# Altium PCB Elevate_sch.PcbDoc (part 1 of 2)
Units mm, origin at the board's own origin, x right, y up, seen from the top; angles counter-clockwise.
Board outline 81.14 x 61.52 mm, 2 copper layers (Top Layer, Bottom Layer), stack 1.554 mm thick; 108 components, 119 nets, 558 pads, 275 vias.
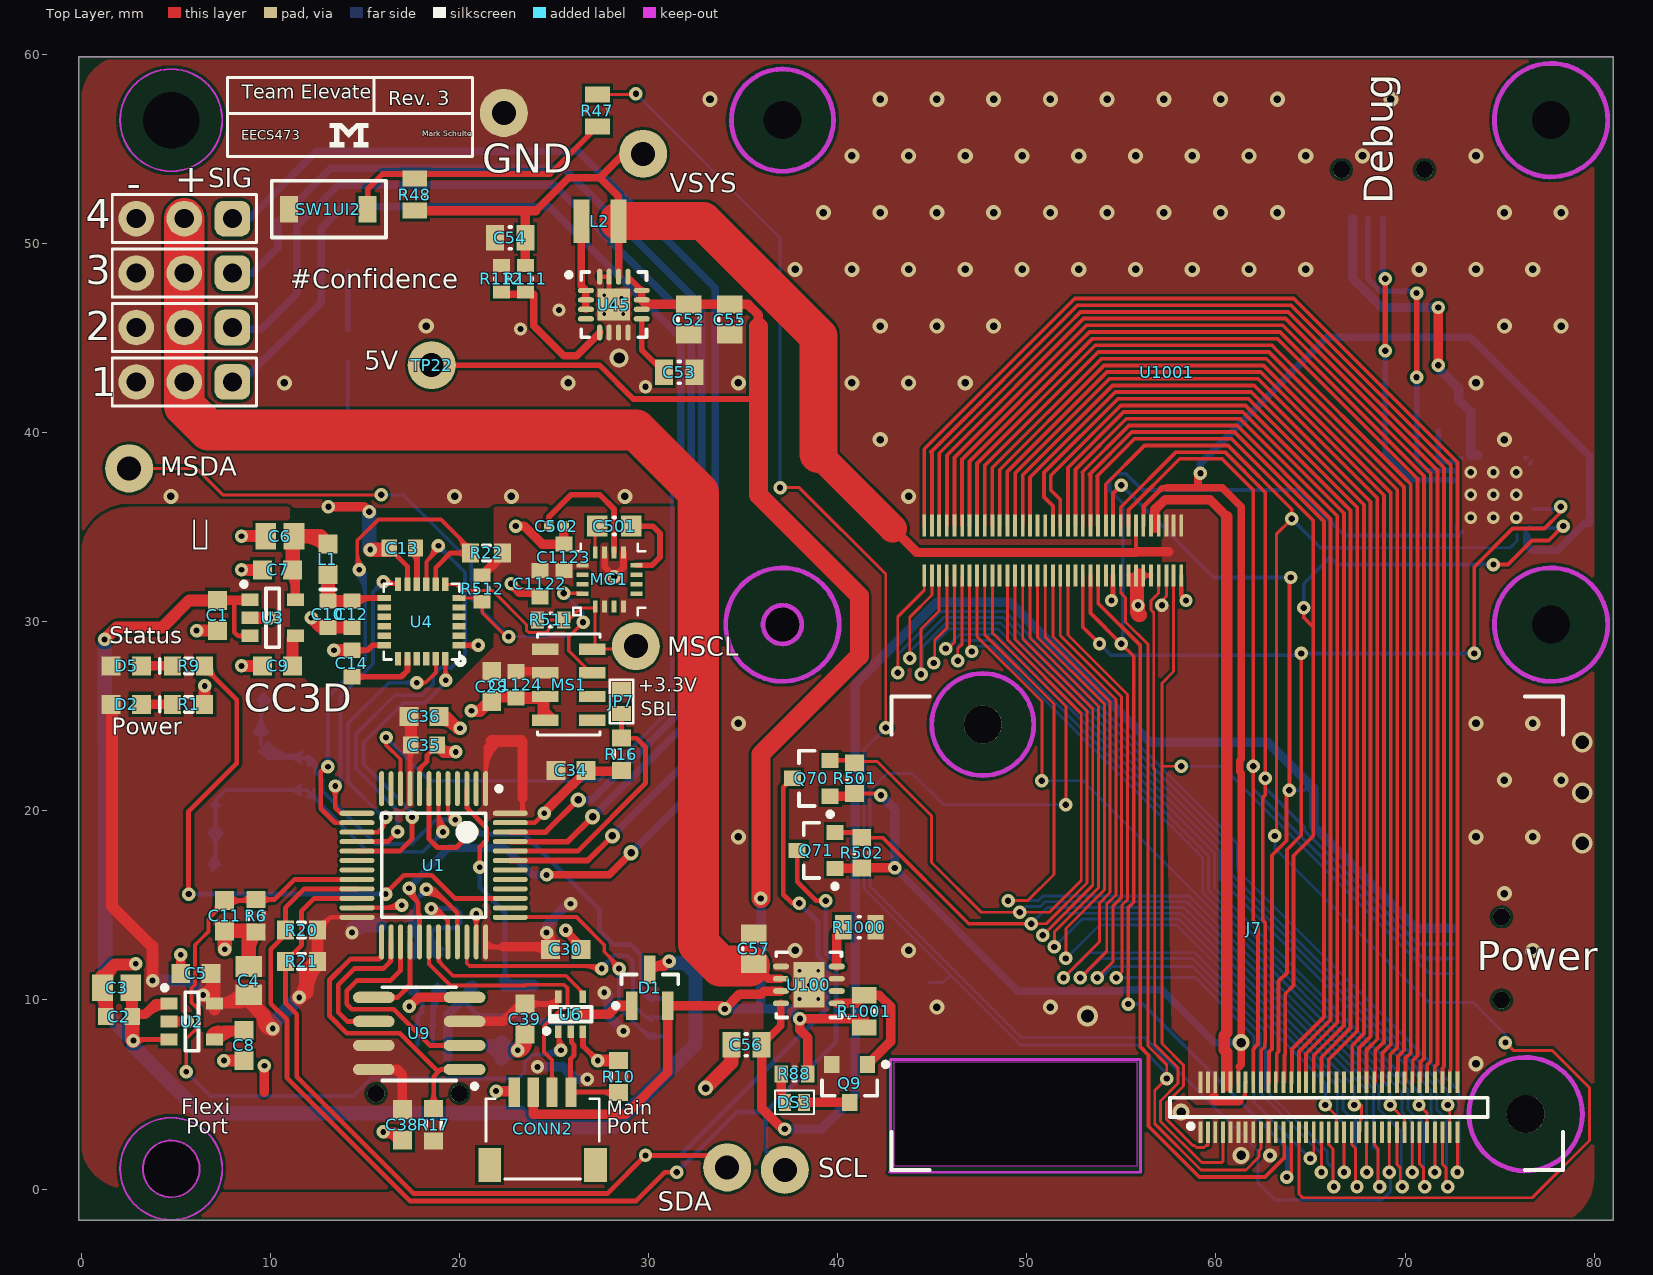
[diagram p0: Top Layer view]
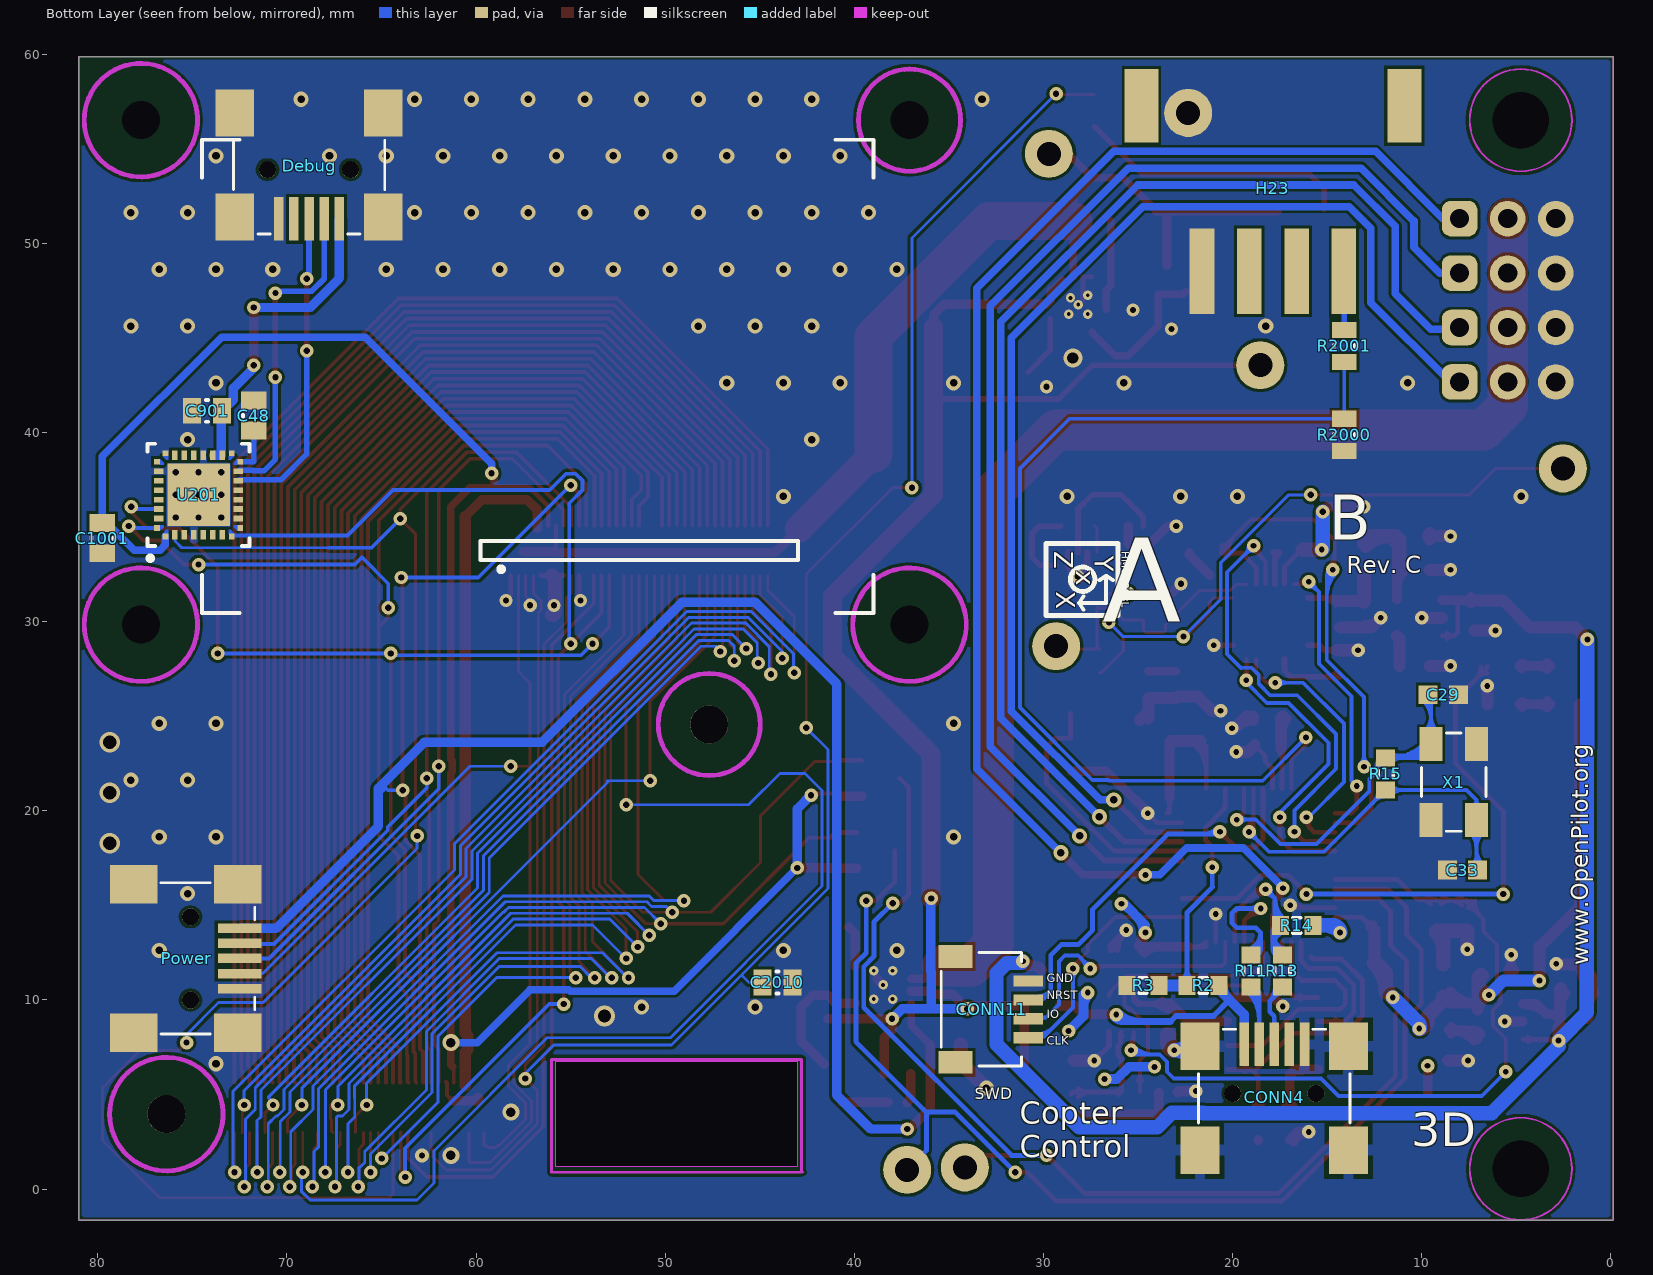
[diagram p1: Bottom Layer view, seen from below]
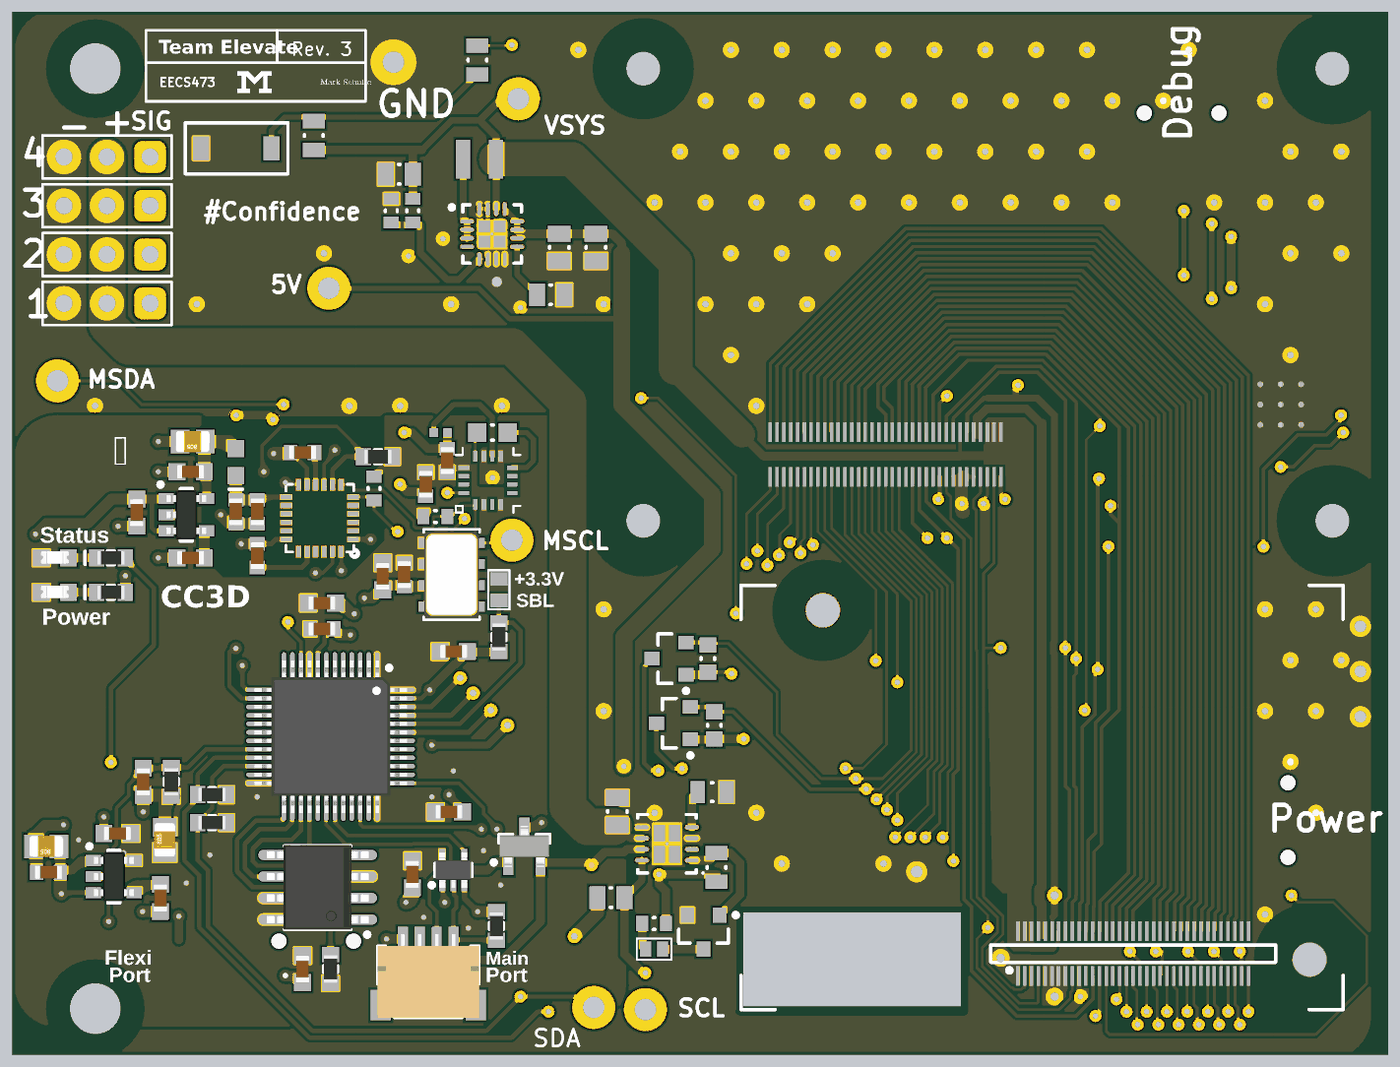
[diagram p3: 3D render of the assembled board from above, using the file's embedded part models]
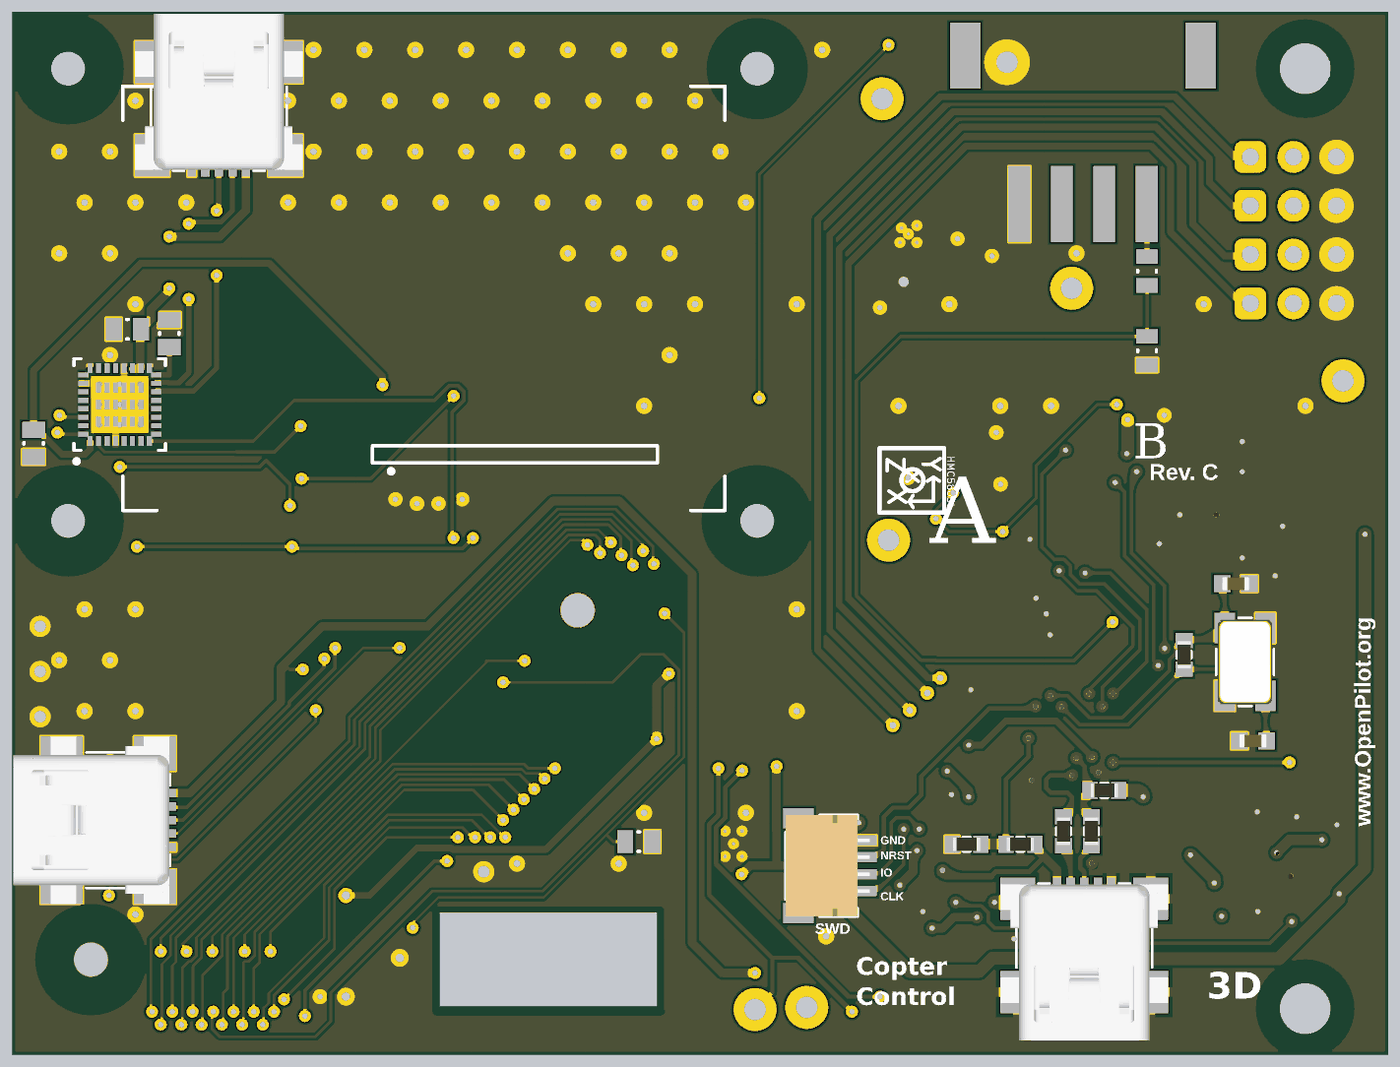
[diagram p4: 3D render of the assembled board from below, using the file's embedded part models]

## Layer stack, top to bottom
Top Solder: solder mask 0.0102, Solder Resist, Dk 3.5
Top Layer: signal copper 0.0356
Dielectric1: core 1.4834, FR-4, Dk 4.8
Bottom Layer: signal copper 0.0356
Bottom Solder: solder mask 0.0102, Solder Resist, Dk 3.5

## Board outline
-0.127,-1.651 81.016,-1.651 81.016,59.873 -0.127,59.873
cut-out: 42.989,1.206 42.989,6.731 55.816,6.731 55.816,1.206

## Design rules (kind name [scope] priority, off if disabled: settings)
AcuteAngle [All] p1: minimum=6.00000000000000E+0001 checktracksonly=FALSE
Clearance [All] p1: gap=0.153
Clearance Clearance_osc [InNet('GND') vs InNet('OSC_IN') or InNet('OSC_OUT')] p2: gap=0.381
Clearance Clearance_outline [All vs OnLayer('Keep-Out Layer')] p3: gap=0.381
Clearance "VCC_UNREG Pour Clearance" [(InNamedPolygon('Top-VCC') OR InNamedPolygon('Bottom Layer-GND')) vs (InNet('VCC_UNREG'))] p4: gap=0.305
Clearance "Small Part Clearance" [(HasFootprint('IMU-3000'))] p5: gap=0.152
ComponentClearance ComponentClearance_servo_headers [InComponent('JP1') or InComponent('JP2') or InComponent('JP3') or InComponent('JP4') or InComponent('JP5') or InComponent('JP6')] p1: gap=0.127 collisioncheckmode=3 verticalgap=0.254 showdistances=FALSE
ComponentClearance [All] p2: gap=0.254 collisioncheckmode=3 verticalgap=0.254 showdistances=FALSE
DiffPairsRouting [All] p1: maxlimit=0.508 minlimit=0.152 mostfreqgap=0.254 toplayer_minwidth=0.381 toplayer_maxwidth=0.381 toplayer_prefwidth=0.381 bottomlayer_minwidth=0.381 bottomlayer_maxwidth=0.381 bottomlayer_prefwidth=0.381 maxuncoupledlength=12.7
HoleSize [All] p1: absolutevalues=TRUE maxlimit=25.4 minlimit=0.305 maxpercent=80.000 minpercent=20.000
MinimumAnnularRing [All] p1: minimumring=0.178
MinimumSolderMaskSliver MinimumSolderMaskSliver_FIL1-3 [InComponent('FIL1') or InComponent('FIL2') or InComponent('FIL3')] p1: minsoldermaskwidth=0.025
MinimumSolderMaskSliver [All] p2: minsoldermaskwidth=0.076
PlaneClearance [All] p1: clearance=0.381
PlaneConnect [All] p1: planeconnectstyle=Direct reliefexpansion=0.508 reliefentries=4 reliefconductorwidth=0.254 reliefairgap=0.254
PolygonConnect PolygonConnect_usb [InComponent('CONN4')] p1: connectstyle=Relief reliefconductorwidth=0.559 reliefentries=4 polygonreliefangle="90 Angle" airgapwidth=0.254
PolygonConnect [All] p2: connectstyle=Direct reliefconductorwidth=0.305 reliefentries=4 polygonreliefangle="90 Angle" airgapwidth=0.254
RoutingVias [All] p1: holewidth=0.381 width=0.787 viastyle="Through Hole" minholewidth=0.332 minwidth=0.686 maxholewidth=0.711 maxwidth=1.27
SilkToSilkClearance SilkToSilkClearance_text [IsText] p1: silktosilkclearance=0
SilkToSilkClearance [All] p2: silktosilkclearance=0.102
SilkToSolderMaskClearance SilkscreenOverComponentPads [IsPad] p1: minsilkscreentomaskgap=0.051 clearancetoexposedcopper=TRUE
SolderMaskExpansion [All] p1: expansion=0.076
UnpouredPolygon [All] p1: allowunpoured=FALSE
Width [All] p1: maxlimit=10.16 minlimit=0.152 preferedwidth=0.254
21 further rules are at their usual default settings.

## Classes and differential pairs
component class U_battery_monitor: H23 R2000 R2001
differential pair USB_D: +USB_D_P -USB_D_N
differential pair USB_R: +USB_R_P -USB_R_N

## Components (designator, comment, footprint, x,y, rotation, side; value= is the part's Value field where it differs from the comment)
1 "Servo out 6" "SIP3 - 0.1" 8.001,42.672 r180 top (schematic designator JP1)
2 "Servo out 6" "SIP3 - 0.1" 8.001,45.551 r180 top (schematic designator JP2)
3 "Servo out 6" "SIP3 - 0.1" 8.001,48.429 r180 top (schematic designator JP3)
4 "Servo out 6" "SIP3 - 0.1" 8.001,51.308 r180 top (schematic designator JP4)
C1 "Cap603" CAP603N 7.214,30.328 r270 top locked
C2 "Cap603" CAP603L 2.007,9.119 r180 top locked
C3 "Cap805" CAP805L 1.88,10.643 r180 top locked
C4 "Cap805" CAP805L 8.865,11.024 r90 top locked
C5 "Cap603" CAP603N 6.071,11.405 r180 top locked
C6 "Cap805" CAP805L 10.516,34.519 r180 top locked
C7 "Cap603" CAP603N 10.389,32.741 r180 top locked
C8 "Cap603" CAP603N 8.611,7.595 r270 top locked
C9 "Cap603" CAP603N 10.389,27.661 r180 top locked
C10 "Cap603" CAP603L 13.056,30.383 r270 top locked
C11 "Cap603" CAP603N 7.595,14.453 r270 top locked
C12 "Cap603" CAP603L 14.326,30.383 r270 top locked
C13 "Cap603" CAP603L 16.993,33.884 r180 top locked
C14 "Cap603" CAP603L 14.326,27.788 r270 top locked
C28 "Cap603" CAP603N 21.717,26.57 r90 top
C29 "Cap603" CAP603N 8.865,26.137 r0 bottom locked
C30 "Cap603" CAP603N 25.629,12.675 r180 top locked
C33 "Cap603" CAP603N 7.849,16.866 r180 bottom locked
C34 "Cap603" CAP603N 25.908,22.137 r180 top
C35 "Cap603" CAP603L 18.136,23.47 r0 top locked
C36 "Cap603" CAP603N 18.136,24.994 r180 top locked
C38 "Cap603" CAP603N 16.993,3.404 r270 top locked
C39 "Cap603" CAP603N 23.47,8.992 r270 top locked
C48 "CAP 100nF 16V 0805(2012)" CAPC0805(2012)145_L 71.755,40.894 r270 bottom
C52 "CAP 100nF 16V 0805(2012)" CAPC0805(2012)145_L 32.131,45.974 r270 top
C53 "CAP 33nF 50V 0805(2012)" CAPC0805(2012)145_L 31.623,43.18 r180 top
C54 "CAP 22uF 6.3V 0805(2012)" CAPC0805(2012)145_L 22.695,50.292 r0 top
C55 "CAP 820pF 25V 0805(2012)" CAPC0805(2012)145_L 34.29,45.974 r90 top
C56 "CAP 100nF 16V 0805(2012)" CAPC0805(2012)145_L 35.179,7.62 r180 top
C57 "CAP 100nF 16V 0805(2012)" CAPC0805(2012)145_L 35.56,12.7 r90 top
C501 "CAP 220nF 6.3V 0603(1608)" CAPC0603(1608)100_M 28.194,35.052 r0 top
C502 "CAP 4.7uF 6.3V 0402(1005)" CAPC0402(1005)60_L 25.127,35.052 r180 top
C901 "CAP 100nF 16V 0805(2012)" CAPC0805(2012)145_L 74.226,41.148 r0 bottom
C1001 "CAP 100nF 16V 0805(2012)" CAPC0805(2012)145_L 79.756,34.417 r270 bottom
C1122 "Cap603" CAP603L 24.257,32.001 r90 top
C1123 "Cap603" CAP603L 25.527,33.401 r270 top
C1124 "Cap603" CAP603L 22.987,26.67 r90 top
C2010 "CAP 220nF 16V 0805(2012)" CAPC0805(2012)145_L 44.069,10.922 r0 bottom
CONN2 "USART 1" "JST SH 4 Pin Side Entry"#1 24.403,0.527 r0 top locked
CONN4 "USB" "USB SMD" 17.799,2.051 r180 bottom locked
CONN11 "USART 1" "JST SH 4 Pin Side Entry"#2 35.408,9.5 r270 bottom
D1 "BAT54C" SOT23-3N 30.074,10.643 r90 top locked
D2 "Green" LED603N 2.388,25.629 r180 top locked
D5 "Blue" LED603N 2.388,27.661 r180 top locked
Debug "USB" "USB SMD" 68.834,56.896 r0 bottom (schematic designator J3)
DS3 "USB PWR" LTST-C281KGKT 37.719,4.583 r180 top
GND "Testpoint" Tespoint_Keystone 22.352,56.896 r0 top
H23 "JST-XH-4" JST-XH-4 10.922,57.277 r0 bottom
J7 "EDISON_CONNECTOR_FULLMOUNTING_HOLES" EDISON_DAUGHTER 78.359,1.016 r90 top
JP7 "2 PAD Touch JMP" "TOUCH JMP 2PAD" 28.575,25.781 r180 top
L1 "FB 300mA" IND603N 13.056,33.304 r90 top locked
L2 "1.0µH" "SMD 2508" 27.432,51.181 r0 top
MG1 "HMC5883L" HMC5883L 27.93,32.23 r90 top (schematic designator MAGNETO1)
MS1 "MS5611" MS5611 25.781,26.67 r0 top
MSCL "TestPoint" Tespoint_Keystone 29.337,28.702 r90 top (schematic designator TP10)
MSDA "Testpoint" Tespoint_Keystone 2.54,38.1 r90 top (schematic designator TP11)
Power "USB" "USB SMD" 78.105,12.192 r270 bottom (schematic designator J16)
Q9 "BSS138LT3G" ONSC-SOT-23-3-318-08_V 40.64,5.588 r270 top
Q70 "BSS138LT3G" ONSC-SOT-23-3-318-08_V 38.608,21.717 r180 top
Q71 "BSS138LT3G" ONSC-SOT-23-3-318-08_V 38.862,17.907 r180 top
R1 "Res603" RES603N 5.69,25.629 r180 top locked
R2 "Res603" RES603N 21.565,10.77 r0 bottom locked
R3 "Res603" RES603N 24.74,10.77 r180 bottom locked
R6 "Res603" RES603N 9.246,14.453 r90 top locked
R9 "Res603" RES603N 5.69,27.661 r0 top locked
R10 "Res603" RES603N 28.423,5.944 r270 top locked
R11 "Res603" RES603N 19.025,11.532 r270 bottom locked
R13 "Res603" RES603N 17.374,11.532 r270 bottom locked
R14 "Res603" RES603N 16.612,13.945 r0 bottom locked
R15 "Res603" RES603N 11.913,21.946 r90 bottom locked
R16 "Res603" RES603N 28.575,22.987 r90 top
R17 "Res603" RES603N 18.644,3.404 r90 top locked
R20 "Res603" RES603N 11.659,13.691 r0 top locked
R21 "Res603" RES603N 11.659,12.04 r0 top locked
R22 "Res603" RES603N 21.438,33.63 r0 top locked
R47 "220R 1% 0805(2012)" RESC0805(2012)_L 27.305,57.023 r90 top
R48 "10K 1% 0805(2012)" RESC0805(2012)_L 17.653,52.578 r270 top
R88 "576R 1% 0603(1608)" RESC0603(1608)_L 37.719,6.096 r0 top
R111 "47K 1% 0603(1608)" RESC0603(1608)_L 23.495,48.133 r90 top
R112 "10K5 1% 0603(1608)" RESC0603(1608)_L 22.225,48.133 r270 top
R501 "4K7 5% 0603(1608)" RESC0603(1608)_N 40.894,21.717 r270 top
R502 "4K7 5% 0603(1608)" RESC0603(1608)_N 41.275,17.78 r270 top
R511 "2K2 1% 0603(1608)" RESC0603(1608)_L 24.827,30.099 r180 top
R512 "2K2 1% 0603(1608)" RESC0603(1608)_L 21.209,31.75 r90 top
R1000 "165R 1% 0805(2012)" RESC0805(2012)_L 41.148,13.843 r180 top
R1001 "10K 1% 0805(2012)" RESC0805(2012)_L 41.402,9.398 r270 top
R2000 "11K 1% 0805(2012)" RESC0805(2012)_L 14.097,39.878 r90 bottom
R2001 "26K1 1% 0805(2012)" RESC0805(2012)_L 14.097,44.577 r90 bottom
SCL "Testpoint" Tespoint_Keystone 37.211,1.016 r0 top (schematic designator TP9)
SDA "Testpoint" Tespoint_Keystone 34.163,1.143 r0 top (schematic designator TP8)
SW1UI2 "Tl1015AF160QG" TL1015AF160QG 13.081,51.816 r180 top
TP22 "Testpoint" Tespoint_Keystone 18.542,43.561 r90 top
U1 "STM32F103CBT6" "STM32 48 Lead" 18.644,17.12 r270 top locked
U2 "LP2992-3.3" SOT23-5L 5.861,8.858 r0 top locked
U3 "LP2992-3.3" SOT23-5L 10.135,30.201 r0 top locked
U4 "MPU-6000" IMU-3000 18.009,30.002 r180 top locked
U6 "XOR" DCK-5 25.883,9.246 r90 top locked
U9 "Flash 16Mbits" SOIC8_N 17.882,8.23 r180 top locked
U45 "TPS62130RGTR" RGT16-1700X1700TP 28.169,46.761 r0 top
U100 "TPS2115ADRBR" DRB8-2400X1650TP 38.481,10.795 r180 top
U201 "FT232RQ-Reel" PQFN5X5-32_V 74.676,36.703 r90 bottom
U1001 "EDISON_CONNECTOR_FULLSOCKET" EDISON_DAUGHTER_TOP 37.084,29.845 r270 top
VSYS "Testpoint" Tespoint_Keystone 29.718,54.737 r90 top (schematic designator TP20)
X1 "8MHz" "XTAL ACT530SMX-4 Series" 8.313,21.521 r90 bottom locked

## Footprints (in the part's own frame and the unit in brackets; to place one, negate y for a bottom-side part, rotate by r counter-clockwise, add the part's x,y. Pads: shape width x height; smd on the part's side, far side on the other; paste and mask are expansions set on the pad)
CAP603L [mm] "Chip Capacitor, Body 1.6x0.8mm, IPC High Density"
  rect 0.8x0.9 smd: 1(-0.7,0) 2(0.7,0)
  body extent -0.8,-0.4 0.8,0.4, height 0.77
CAP603N [mm] "Chip Capacitor, Body 1.6x0.8mm, IPC Medium Density"
  rect 1x1 smd: 1(-0.8,0) 2(0.8,0)
  body extent -0.8,-0.4 0.8,0.4, height 0.77
CAP805L [mm] "Chip Capacitor, Body 2.0x1.3mm, IPC High Density"
  rect 1.1x1.4 smd: 1(-0.75,0) 2(0.75,0)
  body extent -1,-0.62 1,0.63, height 0.78
CAPC0402(1005)60_L [mm] "Chip Capacitor, Body 1.0x0.5mm, Height 0.6mm, IPC High Density"
  rect 0.52x0.52 smd: 1(-0.4,0) 2(0.4,0)
  body extent -0.55,-0.3 0.55,0.3, height 0.6
CAPC0603(1608)100_M [mm] "Chip Capacitor, Body 1.6x0.8mm, Height 1.0mm, IPC Low Density"
  rect 1.1x1.1 smd: 1(-0.9,0) 2(0.9,0)
  silkscreen extent -0.05,-0.45 0.05,0.45, body extent -0.87,-0.47 0.88,0.48, height 1
CAPC0805(2012)145_L [mm] "Chip Capacitor, Body 2.0x1.2mm, Height 1.45mm, IPC High Density"
  rect 0.95x1.35 smd: 1(-0.8,0) 2(0.8,0)
  silkscreen extent -0.05,-0.58 0.05,0.58, body extent -1.1,-0.72 1.1,0.72, height 1.45
DCK-5 [mm] "SOT23-DCK, 5-Leads, Body 2.2x2.4mm (max), Pitch 0.65mm, IPC High Density"
  rect 0.65x0.35 smd mask+0.076: 1(-0.925,0.65) 2(-0.925,0) 3(-0.925,-0.65) 4(0.925,-0.65) 5(0.925,0.65)
  silkscreen extent -0.45,-1.1 0.38,1.1, body extent -1.05,-1.05 1.05,1.05, height 1
DRB8-2400X1650TP [mm] "SON, 8-Leads, Body 3x3mm, Pitch 0.65mm, Thermal Pad 2.4x1.65mm, TI Recommended"
  oval 0.85x0.3 smd paste-0.025 mask+0.07: 1(-1.475,0.975) 2(-1.475,0.325) 3(-1.475,-0.325) 4(-1.475,-0.975) 5(1.475,-0.975) 6(1.475,-0.325) 7(1.475,0.325) 8(1.475,0.975)
  rect 1.65x2.4 smd paste-0.825 mask+0.07: 9(0,0)
  silkscreen extent -2.17,-1.73 1.73,1.77, body extent -1.57,-1.57 1.58,1.58, height 1
EDISON_DAUGHTER [mil]
  rect 45x8 smd mask+0.39: 1(78,755) 2(182,755) 3(78,739) 4(182,739) 5(78,724) 6(182,724) 7(78,708) 8(182,708) 9(78,692) 10(182,692) 11(78,676) 12(182,676) 13(78,661) 14(182,661) 15(78,645) 16(182,645) 17(78,629) 18(182,629) 19(78,613) 20(182,613) 21(78,598) 22(182,598) 23(78,582) 24(182,582) 25(78,566) 26(182,566) 27(78,550) 28(182,550) 29(78,535) 30(182,535) 31(78,519) 32(182,519) 33(78,503) 34(182,503) 35(78,488) 36(182,488) 37(78,472) 38(182,472) 39(78,456) 40(182,456) 41(78,440) 42(182,440) 43(78,425) 44(182,425) 45(78,409) 46(182,409) 47(78,393) 48(182,393) 49(78,377) 50(182,377) 51(78,362) 52(182,362) 53(78,346) 54(182,346) 55(78,330) 56(182,330) 57(78,314) 58(182,314) 59(78,299) 60(182,299) 61(78,283) 62(182,283) 63(78,267) 64(182,267) 65(78,251) 66(182,251) 67(78,236) 68(182,236) 69(78,220) 70(182,220)
  round 79 hole 79 mask+0: 1(116,78)
  round 79 hole 79: 1(927,1208)
  silkscreen extent 0,0 985,1398
EDISON_DAUGHTER_TOP [mil]
  round 0 hole 78.74 unplated mask+0: 1(-1050,1600) 1(-1050,0) 1(0,1600) 1(0,0)
  rect 45x8 smd mask+0.39: 1(-102.16,830.16) 2(-206.16,830.16) 3(-102.16,814.16) 4(-206.16,814.16) 5(-102.16,799.16) 6(-206.16,799.16) 7(-102.16,783.16) 8(-206.16,783.16) 9(-102.16,767.16) 10(-206.16,767.16) 11(-102.16,751.16) 12(-206.16,751.16) 13(-102.16,736.16) 14(-206.16,736.16) 15(-102.16,720.16) 16(-206.16,720.16) 17(-102.16,704.16) 18(-206.16,704.16) 19(-102.16,688.16) 20(-206.16,688.16) 21(-102.16,673.16) 22(-206.16,673.16) 23(-102.16,657.16) 24(-206.16,657.16) 25(-102.16,641.16) 26(-206.16,641.16) 27(-102.16,625.16) 28(-206.16,625.16) 29(-102.16,610.16) 30(-206.16,610.16) 31(-102.16,594.16) 32(-206.16,594.16) 33(-102.16,578.16) 34(-206.16,578.16) 35(-102.16,563.16) 36(-206.16,563.16) 37(-102.16,547.16) 38(-206.16,547.16) 39(-102.16,531.16) 40(-206.16,531.16) 41(-102.16,515.16) 42(-206.16,515.16) 43(-102.16,500.16) 44(-206.16,500.16) 45(-102.16,484.16) 46(-206.16,484.16) 47(-102.16,468.16) 48(-206.16,468.16) 49(-102.16,452.16) 50(-206.16,452.16) 51(-102.16,437.16) 52(-206.16,437.16) 53(-102.16,421.16) 54(-206.16,421.16) 55(-102.16,405.16) 56(-206.16,405.16) 57(-102.16,389.16) 58(-206.16,389.16) 59(-102.16,374.16) 60(-206.16,374.16) 61(-102.16,358.16) 62(-206.16,358.16) 63(-102.16,342.16) 64(-206.16,342.16) 65(-102.16,326.16) 66(-206.16,326.16) 67(-102.16,311.16) 68(-206.16,311.16) 69(-102.16,295.16) 70(-206.16,295.16)
HMC5883L [mm]
  rect 0.63x0.25 smd mask+0.025: 1(-1.427,0.75) 2(-1.427,0.25) 3(-1.427,-0.25) 4(-1.427,-0.75) 9(1.427,-0.75) 10(1.427,-0.25) 11(1.427,0.25) 12(1.427,0.75)
  rect 0.25x0.63 smd mask+0.025: 5(-0.75,-1.427) 6(-0.25,-1.427) 7(0.25,-1.427) 8(0.75,-1.427) 13(0.75,1.427) 14(0.25,1.427) 15(-0.25,1.427) 16(-0.75,1.427)
  silkscreen extent -1.9,-1.9 1.9,1.9, body extent -1.5,-1.5 1.5,1.5, height 1.1
IMU-3000 [mm]
  rect 0.711x0.337 smd paste-0.03 mask+0.04: 1(-1.975,1.25) 2(-1.975,0.75) 3(-1.975,0.25) 4(-1.975,-0.25) 5(-1.975,-0.75) 6(-1.975,-1.25) 13(1.975,-1.25) 14(1.975,-0.75) 15(1.975,-0.25) 16(1.975,0.25) 17(1.975,0.75) 18(1.975,1.25)
  rect 0.337x0.711 smd paste-0.03 mask+0.04: 7(-1.25,-1.975) 8(-0.75,-1.975) 9(-0.25,-1.975) 10(0.25,-1.975) 11(0.75,-1.975) 12(1.25,-1.975) 19(1.25,1.975) 20(0.75,1.975) 21(0.25,1.975) 22(-0.25,1.975) 23(-0.75,1.975) 24(-1.25,1.975)
  silkscreen extent -2.25,-2 2,2.27, body extent -2,-2 2,2, height 0.95
IND603N [mm] "Chip Inductor, Body 1.6x0.8mm, IPC Medium Density"
  rect 1x1 smd: 1(-0.8,0) 2(0.8,0)
  silkscreen extent -1.6,-0.4 -1.6,0.4, body extent -0.87,-0.48 0.87,0.48, height 0.71
"JST SH 4 Pin Side Entry"#1 [mm] "SM04B-SRSS-TB"
  rect 1.2x1.8 smd paste+0 mask+0.051: 0(-2.8,0.75) 0(2.8,0.75)
  rect 0.6x1.55 smd paste+0 mask+0.051: 1(-1.5,4.6) 2(-0.5,4.6) 3(0.5,4.6) 4(1.5,4.6)
  silkscreen extent -3,0 3,4.25, body extent -3,0 3,4.95, height 2.92
"JST SH 4 Pin Side Entry"#2 [mm] "SM04B-SRSS-TB"
  rect 1.2x1.8 smd paste+0 mask+0.051: 0(-2.8,0.75) 0(2.8,0.75)
  rect 0.6x1.55 smd paste+0: 1(-1.5,4.6)
  rect 0.6x1.55 smd paste+0 mask+0.051: 2(-0.5,4.6) 3(0.5,4.6) 4(1.5,4.6)
  silkscreen extent -3,0 3,4.25, body extent -3,0 3,4.95, height 2.92
JST-XH-4 [mm]
  rect 1.8x3.9 smd: 0(0,0) 5(13.9,0)
  rect 1.3x4.5 smd: 1(3.2,8.75) 2(5.7,8.75) 3(8.2,8.75) 4(10.7,8.75)
LED603N [mm] "Chip LED, Body 1.6x0.8mm, IPC Medium Density"
  rect 1x1 smd: 1(-0.8,0) 2(0.8,0)
  silkscreen extent -1.78,-0.38 -1.78,0.38, body extent -0.82,-0.38 0.82,0.34, height 0.68
LTST-C281KGKT [mm]
  rect 0.65x0.9 smd: 1(-0.5,0) 2(0.5,0)
  silkscreen extent -1.02,-0.63 1.02,0.63
MS5611 [mm] "QFN, 8-Leads, Body 5.00x3.00mm, Pitch 1.25mm/0.00mm, Thermal Pad 4.35x0.00mm, IPC Medium Density"
  rect 1.4x0.6 smd: 1(-1.25,1.875) 2(-1.25,0.625) 3(-1.25,-0.625) 4(-1.25,-1.875) 5(1.25,-1.875) 6(1.25,-0.625) 7(1.25,0.625) 8(1.25,1.875)
  silkscreen extent -1.65,-2.67 1.65,2.67, body extent -1.6,-2.5 1.6,2.5, height 1
ONSC-SOT-23-3-318-08_V [mm] "SOT23, 3-Leads, Body 2.92x1.3mm, Pitch 0.95mm"
  rect 0.9x0.8 smd: 1(-1,0.95) 2(-1,-0.95) 3(1,0)
  silkscreen extent -1.12,-1.46 0.65,2.03, body extent -0.65,-1.46 0.65,1.46, height 1.11
PQFN5X5-32_V [mm] "QFN, 32-Leads, Body 5x5mm, Pitch 0.5mm, FTDI Recommended"
  rect 0.3x0.3 smd paste-0.15: 1(-2.2,1.75) 8(-2.2,-1.75) 9(-1.75,-2.2) 16(1.75,-2.2) 17(2.2,-1.75) 24(2.2,1.75) 25(1.75,2.2) 32(-1.75,2.2)
  rect 0.5x0.3 smd paste-0.15: 2(-2.1,1.25) 3(-2.1,0.75) 4(-2.1,0.25) 5(-2.1,-0.25) 6(-2.1,-0.75) 7(-2.1,-1.25) 18(2.1,-1.25) 19(2.1,-0.75) 20(2.1,-0.25) 21(2.1,0.25) 22(2.1,0.75) 23(2.1,1.25)
  rect 0.3x0.5 smd paste-0.15: 10(-1.25,-2.1) 11(-0.75,-2.1) 12(-0.25,-2.1) 13(0.25,-2.1) 14(0.75,-2.1) 15(1.25,-2.1) 26(1.25,2.1) 27(0.75,2.1) 28(0.25,2.1) 29(-0.25,2.1) 30(-0.75,2.1) 31(-1.25,2.1)
  rect 3.3x3.3 smd paste-1.65: 33(0,0)
  Top Layer region: -2.05,-1.6 -1.85,-1.6 -1.85,-1.7 -2.05,-1.9
  Top Layer region: 2.05,-1.6 1.85,-1.6 1.85,-1.7 2.05,-1.9
  Top Layer region: 2.05,1.6 1.85,1.6 1.85,1.7 2.05,1.9
  Top Layer region: -2.05,1.6 -1.85,1.6 -1.85,1.7 -2.05,1.9
  Top Layer region: -1.6,-2.05 -1.6,-1.85 -1.7,-1.85 -1.9,-2.05
  Top Layer region: 1.6,-2.05 1.6,-1.85 1.7,-1.85 1.9,-2.05
  Top Layer region: 1.6,2.05 1.6,1.85 1.7,1.85 1.9,2.05
  Top Layer region: -1.6,2.05 -1.6,1.85 -1.7,1.85 -1.9,2.05
  silkscreen extent -3.47,-2.7 2.7,2.7, body extent -2.55,-2.55 2.55,2.55, height 1
RES603N [mm] "Chip Resistor, Body 1.6x0.8mm, IPC Medium Density"
  rect 0.9x1 smd: 1(-0.85,0) 2(0.85,0)
  silkscreen extent -0.2,-0.4 0.2,0.4, body extent -0.8,-0.4 0.8,0.4, height 0.44
RESC0603(1608)_L [mm] "Chip Resistor, Body 1.6x0.8mm, IPC High Density"
  rect 0.7x0.9 smd: 1(-0.7,0) 2(0.7,0)
  silkscreen extent -0.05,-0.35 0.05,0.35, body extent -0.85,-0.47 0.85,0.47, height 0.6
RESC0603(1608)_N [mm] "Chip Resistor, Body 1.6x0.8mm, IPC Medium Density"
  rect 0.9x1 smd: 1(-0.8,0) 2(0.8,0)
  silkscreen extent -0.05,-0.4 0.05,0.4, body extent -0.85,-0.47 0.85,0.47, height 0.6
RESC0805(2012)_L [mm] "Chip Resistor, Body 2.0x1.3mm, IPC High Density"
  rect 0.85x1.3 smd: 1(-0.85,0) 2(0.85,0)
  silkscreen extent -0.05,-0.55 0.05,0.55, body extent -1.1,-0.67 1.1,0.68, height 0.7
RGT16-1700X1700TP [mm] "QFN, 16-Leads, Body 3x3mm, Pitch 0.5mm, Thermal Pad 1.7x1.7mm, TI Recommended"
  oval 0.85x0.28 smd paste-0.025 mask+0.07: 1(-1.475,0.75) 2(-1.475,0.25) 3(-1.475,-0.25) 4(-1.475,-0.75) 9(1.475,-0.75) 10(1.475,-0.25) 11(1.475,0.25) 12(1.475,0.75)
  oval 0.28x0.85 smd paste-0.025 mask+0.07: 5(-0.75,-1.475) 6(-0.25,-1.475) 7(0.25,-1.475) 8(0.75,-1.475) 13(0.75,1.475) 14(0.25,1.475) 15(-0.25,1.475) 16(-0.75,1.475)
  rect 1.7x1.7 smd paste-0.85 mask+0.07: 17(0,0)
  silkscreen extent -2.5,-1.73 1.73,1.73, body extent -1.57,-1.57 1.58,1.58, height 1
"SIP3 - 0.1" [mil] "Standard 0.1 3 Pin Header"
  rrect50% 74x74 hole 40: 1(0,0)
  round 74 hole 40: 2(100,0) 3(200,0)
  silkscreen extent -50,-50 250,50, body extent -47,-47 248,47, height 394
"SMD 2508" [mm] "Chip Inductor, 2-Leads, Body 2.5x2.0mm, IPC Medium Density"
  rect 0.85x2.3 smd: 1(-0.975,0) 2(0.975,0)
SOIC8_N [mm] "8-Pin Small Outline Integrated Circuit Package (SOIC8), IPC Medium Density"
  oval 2.2x0.6 smd: 1(-2.4,1.905) 2(-2.4,0.635) 3(-2.4,-0.635) 4(-2.4,-1.905) 5(2.4,-1.905) 6(2.4,-0.635) 7(2.4,0.635) 8(2.4,1.905)
  silkscreen extent -3.05,-2.44 1.96,2.92, body extent -3.01,-2.5 3.01,2.5, height 1.75
SOT23-3N [mm] "SOT23, 3-Leads, Body 2.9x1.3mm, Pitch 0.95mm, Lead Span 2.5mm, IPC Medium Density"
  rect 1.5x0.6 smd: 1(-0.95,0.95) 2(-0.95,-0.95) 3(0.95,0)
  silkscreen extent -1.07,-1.5 0.7,1.92, body extent -1.21,-1.45 1.21,1.45, height 0.99
SOT23-5L [mm] "SOT23, 5-Leads, Body 2.9x1.6mm, Pitch 0.95mm, Lead Span 2.8mm, IPC High Density"
  rect 0.9x0.65 smd mask+0.076: 1(-1.2,0.95) 2(-1.2,0) 3(-1.2,-0.95) 4(1.2,-0.95) 5(1.2,0.95)
  silkscreen extent -1.56,-1.55 0.35,1.91, body extent -1.17,-1.46 1.17,1.46, height 0.97
"STM32 48 Lead" [mm] "Thin QFP, 48-Leads, Body 7x7mm, Pitch 0.5mm, IPC Medium Density"
  oval 1.85x0.265 smd mask+0.076: 1(-4.05,2.75) 2(-4.05,2.25) 3(-4.05,1.75) 4(-4.05,1.25) 5(-4.05,0.75) 6(-4.05,0.25) 7(-4.05,-0.25) 8(-4.05,-0.75) 9(-4.05,-1.25) 10(-4.05,-1.75) 11(-4.05,-2.25) 12(-4.05,-2.75) 25(4.05,-2.75) 26(4.05,-2.25) 27(4.05,-1.75) 28(4.05,-1.25) 29(4.05,-0.75) 30(4.05,-0.25) 31(4.05,0.25) 32(4.05,0.75) 33(4.05,1.25) 34(4.05,1.75) 35(4.05,2.25) 36(4.05,2.75)
  oval 0.265x1.85 smd mask+0.076: 13(-2.75,-4.05) 14(-2.25,-4.05) 15(-1.75,-4.05) 16(-1.25,-4.05) 17(-0.75,-4.05) 18(-0.25,-4.05) 19(0.25,-4.05) 20(0.75,-4.05) 21(1.25,-4.05) 22(1.75,-4.05) 23(2.25,-4.05) 24(2.75,-4.05) 37(2.75,4.05) 38(2.25,4.05) 39(1.75,4.05) 40(1.25,4.05) 41(0.75,4.05) 42(0.25,4.05) 43(-0.25,4.05) 44(-0.75,4.05) 45(-1.25,4.05) 46(-1.75,4.05) 47(-2.25,4.05) 48(-2.75,4.05)
  silkscreen extent -4.17,-2.75 2.75,3.58, body extent -4.5,-4.49 4.5,4.51, height 1.56
Tespoint_Keystone [mm]
  round 2.54 hole 1.27 unplated: 1(0,0)
TL1015AF160QG [mm] "Simple switch"
  rect 0.95x1.4 smd: 1(-2.075,0) 2(2.075,0)
  silkscreen extent -3.05,-1.5 3,1.5
"TOUCH JMP 2PAD" [mil] "Touch Jumper 2 Pad"
  rect 40x31.5 smd mask+0: 1(0,25) 2(0,-25)
  silkscreen extent -25,-45 25,45
"USB SMD" [mm] "DX2R005HN2E700"
  rect 2.05x2.5 smd: 0(-3.925,0) 0(-3.925,5.5) 0(3.925,0) 0(3.925,5.5)
  rect 0.5x2.3 smd mask+0.085: 1(-1.6,5.6) 2(-0.8,5.6) 3(0,5.6) 4(0.8,5.6) 5(1.6,5.6)
  round 0.9 hole 0.9 unplated: 6(-2.2,3) 6(2.2,3)
  silkscreen extent -4,1.45 4,6.4, body extent -4.95,-2.85 4.95,6.35, height 4.17
"XTAL ACT530SMX-4 Series" [mm] "ACT530SMX-4Series from ACT"
  rect 1.8x1.2 smd: 1(-2,-1.2) 2(2,-1.2) 3(2,1.2) 4(-2,1.2)
  silkscreen extent -2.6,-1.7 2.6,1.7, body extent -2.5,-1.6 2.5,1.6, height 1

## Part data
1 2 3 4: library part "Hdr 3 Pin 0.1", "Header, 3-Pin, 0.1\""
C1 C2 C3 C4 C5 C6 C7 C8 C9 C10 C11 C12 C13 C14 C28 C29 C30 C33 C34 C35 C36 C38 C39 C1122 C1123 C1124: "Capacitor SMD"
C48 C52 C56 C57 C901 C1001: library part CMP-1036-04401-1, "CAP 100nF 16V ±10% 0805 (2012 Metric) Thickness 1.45mm SMD"
C53: library part CMP-1036-04168-1, "CAP 33nF 50V ±10% 0805 (2012 Metric) Thickness 1.45mm SMD"
C54: library part CMP-1036-04939-1, "CAP 22uF 6.3V ±20% 0805 (2012 Metric) Thickness 1.45mm SMD"
C55: library part CMP-1036-02893-1, "CAP 820pF 25V ±10% 0805 (2012 Metric) Thickness 1.45mm SMD"
C501: library part CMP-1035-02636-1, "CAP 220nF 6.3V ±10% 0603 (1608 Metric) Thickness 1mm SMD"
C502: library part CMP-1034-02136-1, "CAP 4.7uF 6.3V ±10% 0402 (1005 Metric) Thickness 0.6mm SMD"
C2010: library part CMP-1036-04533-1, "CAP 220nF 16V ±10% 0805 (2012 Metric) Thickness 1.45mm SMD"
CONN2 CONN11: library part "JST-SH 4-pin Side Entry Socket", "JST-SH 4-pin Side Entry Socket"
CONN4 Debug Power: library part USB_SMT_B, "USB Type-B SMT Socket"
D1: "Dual Diode Command Cathode"
D2: library part "LED 603 Gr", "Green 603 LED"
D5: library part "LED 603 Bl", "Blue 603 LED"
DS3: library part LED_Edison
GND MSDA SCL SDA TP22 VSYS: library part TestPoint
JP7: "2 Pad Touch Jumper"
L1: library part FerriteBead_300mA, "Ferrite Bead 300mA"
L2: library part "WE-MAPI 2508 ,74438322010", "Power Multilayer Inductor WE-MAPI, L=1.0µH"
MS1: "Sensor"
MSCL: "Testpoint"
Q9 Q70 Q71: library part CMP-1058-00765-1, "Power MOSFET, 200 mA, 50 V, N-Channel, 3-Pin SOT-23, Pb-Free, Tape and Reel"
R1 R2 R3 R6 R9 R10 R11 R13 R14 R15 R16 R17 R20 R21 R22: "Resistor SMD"
R47: library part CMP-1013-00433-1, "220R 0.125W 1% 0805 (2012 Metric)  SMD"
R48 R1001: library part CMP-1013-00623-1, "10K 0.125W 1% 0805 (2012 Metric)  SMD"
R88: library part CMP-1012-00483-1, "576R 0.1W 1% 0603 (1608 Metric)  SMD"
R111: library part CMP-1012-00699-1, "47K 0.1W 1% 0603 (1608 Metric)  SMD"
R112: library part CMP-1012-00625-1, "10K5 0.1W 1% 0603 (1608 Metric)  SMD"
R501 R502: library part CMP-1012-00090-1, "4K7 0.1W 5% 0603 (1608 Metric)  SMD"
R511 R512: library part CMP-1012-00546-1, "2K2 0.1W 1% 0603 (1608 Metric)  SMD"
R1000: library part CMP-1013-00420-1, "165R 0.125W 1% 0805 (2012 Metric)  SMD"
R2000: library part CMP-1013-00627-1, "11K 0.125W 1% 0805 (2012 Metric)  SMD"
R2001: library part CMP-1013-00668-1, "26K1 0.125W 1% 0805 (2012 Metric)  SMD"
U1: "STM32 ARM-based 32-bit MCU with 128 Kbytes Flash, 48-pin LQFP, Industrial Temperature"
U2 U3: library part LP2985-3.3, "3.3V 250mA LDO Regulator"
U4: library part MPU-3/6000, "Invensense MPU-3/6000,  3-axis Gyros & Accel on 6000"
U6: library part "XOR SN74LVC1G86DCKR", "XOR Gate SN74LVC1G86DCKR"
U9: library part "Flash 16Mb 75MHZ 8SOIC", "16Mbit SPI Flash Memory"
U45: library part CMP-0323-00115-2, "Buck Step Down Regulator with 3 to 17 V Input and 0.9 to 6 V Output, -40 to 85 degC, 16-Pin QFN (RGT), Green (RoHS & no Sb/Br)"
U100: "Dual In / Single Out Autoswitching Power Mux, 2.8 to 5.5 V, -40 to 85 degC, 8-pin SON (DRB), Green (RoHS & no Sb/Br)"
U201: library part CMP-0078-00009-1, "USB UART Asynchronous Serial Data Transfer Chip, QFN-32, Tape and Reel"
X1: library part "XTAL ACT530SMX-4", "Surface Mount Quartz Crystal, Digikey 535-9720-1-ND"

## Free pads (board coordinates)
  round 0 hole 3 unplated: 0(4.769,1.069)
  round 2.54 hole 3 unplated mask+0: 0(4.769,56.515)

## Via types
v1: diameter 0.711, hole 0.332, Top Layer to Bottom Layer, 90 vias
v2: diameter 0.8, hole 0.4, Top Layer to Bottom Layer, 85 vias
v3: diameter 0.711, hole 0.305, Top Layer to Bottom Layer, tented both sides, 66 vias
v4: diameter 0.66, hole 0.33, Top Layer to Bottom Layer, tented top, 9 vias
v5: diameter 0.69, hole 0.33, Top Layer to Bottom Layer, 6 vias
v6: diameter 0.5, hole 0.2, Top Layer to Bottom Layer, tented top, 5 vias
v7: diameter 0.5, hole 0.2, Top Layer to Bottom Layer, 5 vias
v8: diameter 1.1, hole 0.7, Top Layer to Bottom Layer, 4 vias
v9: diameter 0.9, hole 0.5, Top Layer to Bottom Layer, 3 vias
v10: diameter 0.73, hole 0.332, Top Layer to Bottom Layer, 1 vias
v11: diameter 1, hole 0.6, Top Layer to Bottom Layer, 1 vias

## Nets (pads, with @x,y where several pads share a name; then routed paths per layer and width w, separated by ;. In a path a pad name is that pad's centre, name@x,y a point inside that pad or via, vN(x,y) a via of type N, cw(c..) or ccw(c..) an arc to the next point about the centre after c; other vN are vias at no path point)
5V: C52.1 C55.2 CONN2.2 D1.2 R88.2 R1001.2 TP22.1 U45.10 U45.11 U45.12 U45.13 U100.7 | length 96.7
  Top Layer w0.3: TP22.1@18.542,43.561 27.406,43.561 29.197,41.77 35.7,41.77 ; U45.13@29.027,48.128 U45.12@29.644,47.511
  Top Layer w0.4: U45.11@29.644,47.011 U45.12@29.644,47.511
  Top Layer w0.5: CONN2.2@23.903,5.127 23.903,3.949 28.798,3.949 31.024,6.175 D1.2@31.024,9.693 33.868,9.693 v1(34.036,9.525) 34.821,10.31 35.963,10.31 36.123,10.47 U100.7@37.006,10.47 ; U45.11@29.644,47.011 29.881,46.774 C52.1@32.131,46.774 C55.2@34.29,46.774 35.268,46.774 35.814,46.228 35.814,45.593 ; R88.2@38.419,6.096 38.419,8.012 38.011,8.42 v1(38.011,8.998) 41.402,8.998
  Top Layer w1: 35.814,45.593 35.814,36.703 41.148,31.369 41.148,28.194 35.941,22.987 v1(35.941,15.367)
  Bottom Layer w0.5: v1(34.036,9.525) 35.941,9.525 ; 35.941,11.493 35.941,9.525 ; v1(35.941,15.367) 35.961,15.347 35.961,11.513 ; v1(38.011,8.998) 37.484,9.525 35.941,9.525
BOOT: JP7.1 R16.2 U1.44 | length 13.3
  Top Layer w0.254: U1.44@22.694,17.87 26.252,17.87 29.845,21.463 29.845,23.368 29.376,23.837 R16.2@28.575,23.837 JP7.1@28.575,25.146
CS_FLSH: R17.2 U1.25 U9.1 | length 18
  Top Layer w0.254: 15.614,12.167 ccw(c15.614,12.557) U1.25@15.89,12.281 ; U1.25@15.85,12.294 15.723,12.167 ; U1.25@15.888,12.279 cw(c15.723,12.345) 15.723,12.167 ; R17.2@18.415,4.482 ccw(c17.864,5.033) 18.644,5.033 ccw(c19.423,5.033) R17.2@18.872,4.482 ; R17.2@18.644,4.254 18.644,5.944 18.898,6.198 ; U9.1@19.359,6.202 ccw(c19.064,5.907) 19.064,6.325 ccw(c19.064,6.742) U9.1@19.359,6.447 ; U9.1@20.282,6.325 19.025,6.325 18.898,6.198 ; 15.723,12.167 14.249,12.167 13.137,11.054 13.137,9.153 14.055,8.234 16.861,8.234 18.898,6.198
GND: 1.3 2.3 3.3 4.3 C1.2 C2.2 C3.2 C4.2 C5.2 C6.2 C7.2 C8.2 C9.2 C10.2 C11.2 C12.2 C13.2 C14.1 C28.1 C29.1 C30.1 C33.1 C34.1 C35.2 C36.1 C38.2 C39.2 C48.1 C52.2 C53.1 C54.1 C55.1 C56.2 C57.2 C502.1 C901.2 C1001.2 C1122.1 C1123.1 C1124.1 C2010.1 CONN2.1 CONN4.0 CONN4.5 CONN11.1 Debug.0 Debug.5 GND.1 H23.4 J7.1@59.182,2.997 J7.5 J7.9 J7.11 J7.13 J7.15 J7.19 MG1.9 MG1.11 MS1.3 MS1.4 Power.0 Power.5 Q9.2 R1.1 R3.1 R6.1 R10.1 R16.1 R112.1 R1000.1 R2000.1 SW1UI2.2 U1.8 U1.23 U1.35 U1.47 U2.2 U3.2 U4.1 U4.11 U4.18 U6.3 U9.4 U45.6 U45.7 U45.8 U45.15 U45.16 U45.17 U100.3 U100.5 U100.9 U201.4 U201.17 U201.20 U201.24 U201.26 U201.33 U1001.1@58.17,32.44 U1001.5 U1001.9 U1001.11 U1001.13 U1001.15 U1001.19 X1.2 X1.4 | length 107.5
  Top Layer w0.154: v1(57.15,30.861) 57.15,31.115 57.383,31.348 U1001.5@57.383,32.44
  Top Layer w0.25: U45.16@27.419,48.236 U45.15@27.919,48.236 U45.17@27.919,47.011 ; v5@54.563,31.195 U1001.19@54.563,32.44 ; U1001.15@55.376,32.44 55.973,32.44 U1001.9@56.57,32.44 ; 58.17,31.365 U1001.1@58.17,32.44
  Top Layer w0.254: U1.23@14.594,14.87 16.823,14.87 v3(16.957,15.003) ; 16.082,14.87 ccw(c16.082,15.878) v3@16.795,15.165 ; C13.2@16.293,33.884 17.259,32.918 U4.11@17.259,31.977 ; U1.8@17.894,21.17 17.894,22.212 18.285,22.603 18.285,22.919 C35.2@18.836,23.47 ; U1.8@17.899,21.962 cw(c18.515,21.962) 18.079,22.397 ; v3@20.732,14.382 cw(c20.342,13.992) 20.894,13.992 cw(c21.446,13.992) v3@21.055,14.382 ; U1.35@20.894,13.07 v3(20.894,14.544) ; U1.47@22.694,19.37 23.98,19.37 v3(24.486,19.876)
  Top Layer w0.305: C14.1@14.326,28.488 15.153,28.488 15.417,28.752 U4.18@16.034,28.752 ; C14.1@14.551,28.312 cw(c14.973,27.89) 14.973,28.488 cw(c14.973,29.085) C14.1@14.551,28.663 ; U4.1@19.984,28.752 v3(21.005,28.752) ; v3@20.861,28.608 ccw(c20.514,28.261) 20.514,28.752 ccw(c20.514,29.242) v3@20.861,28.895 ; U6.3@26.533,8.321 26.543,8.31 26.543,7.569 v3(27.319,6.794) ; v3@27.115,6.794 ccw(c26.625,6.794) 26.972,7.14 ccw(c27.319,7.487) v3@27.319,6.997
  Top Layer w0.35: MG1.11@27.68,33.657 27.68,32.899 v1(28.194,32.385) 28.68,32.871 MG1.9@28.68,33.657
  Top Layer w0.381: v3@25.586,13.531 cw(c25.444,13.003) 25.918,13.276 ; v3@25.629,13.525 cw(c25.629,13.127) 25.91,13.409 cw(c26.192,13.691) v3@25.794,13.691 ; v3(25.629,13.691) 26.429,12.891 C30.1@26.429,12.675 ; v3@25.748,13.572 cw(c24.851,12.675) C30.1@26.119,12.675
  Top Layer w0.5: v1(13.081,36.068) 14.986,36.068 v1@15.199,35.855 ; v1@15.199,35.814 v1(15.24,35.814) ; v3(24.486,19.876) 24.486,19.906 25.956,21.377 25.987,21.377 26.708,22.098 R16.1@28.536,22.098 ; v7(38.481,10.795) U100.9@38.806,11.12
  Top Layer w0.508: U2.2@4.661,8.858 5.683,8.858 5.676,8.865 v3(5.619,8.865) ; C5.2@5.097,11.579 ccw(c4.677,11.998) 5.271,11.998 ccw(c5.864,11.998) C5.2@5.445,11.579 ; C5.2@5.271,11.405 v3(5.271,12.383) ; v3@15.994,2.922 cw(c16.184,1.795) C38.2@16.993,2.604 16.574,3.023 v3(15.977,3.023) cw(c15.977,2.16) C38.2@16.767,2.505 ; v3(17.352,9.656) 17.831,10.135 U9.4@20.282,10.135 ; v1(22.733,32.004) 23.179,31.558 C1122.1@24.257,31.558 ; v1(22.987,35.052) 23.434,35.052 24.385,34.101 C1123.1@25.527,34.101 C502.1@25.527,35.052
  Top Layer w0.559: v3(21.946,5.182) 22.848,5.182 CONN2.1@22.903,5.127
  Top Layer w0.635: C3.2@1.13,11.219 1.789,11.878 ; C3.2@1.362,10.8 cw(c2.82,10.846) 1.789,11.878 ; v3(2.896,11.913) 2.861,11.878 1.789,11.878 ; v3(6.109,29.528) C1.2@7.214,29.528 ; R1.1@6.54,25.629 v3(6.54,26.601) ; v3(7.557,6.795) C8.2@8.611,6.795 ; v3(8.484,27.661) C9.2@9.589,27.661 ; v3(8.484,32.741) C7.2@9.589,32.741 ; v3(8.484,34.519) C6.2@9.666,34.519 ; U3.2@8.935,30.201 v3(10.008,30.201) ; C6.2@9.601,34.354 ccw(c9.204,33.957) 9.204,34.519 ccw(c9.204,35.08) C6.2@9.601,34.683 ; v3(12.167,30.201) 12.685,29.683 C10.2@13.056,29.683 C12.2@14.326,29.683 ; v3@12.317,30.05 ccw(c13.006,30.739) C10.2@13.006,29.765 ; v3(13.372,28.488) C14.1@14.326,28.488 ; C35.2@18.836,23.47 19.191,23.114 v3(19.812,23.114) ; C36.1@18.936,24.811 cw(c18.936,23.543) v3@19.833,24.44 ; C36.1@18.936,24.994 19.279,24.994 19.914,24.359 v3(20.041,24.359) ; v3(20.638,25.286) 21.095,25.286 21.844,26.035 22.922,26.035 C1124.1@22.987,25.97 24.456,25.97 MS1.4@24.456,24.87 ; MS1.4@24.646,25.061 MS1.4@24.905,24.802 ; v3(27.319,6.794) R10.1@28.423,6.794
  Top Layer w0.75: v5(55.88,30.861) 55.88,30.378 55.902,30.357 55.973,30.357 55.834,30.496 55.834,32.301 55.973,32.44
  Top Layer w0.762: C3.2@1.01,10.373 cw(c0.294,9.657) 1.307,9.657 ; C3.2@1.13,11.219 C3.2@1.13,10.643 1.307,10.466 C2.2@1.307,9.119 ; v3(7.595,12.675) C11.2@7.595,13.653 9.196,13.653 R6.1@9.246,13.603 8.865,13.222 C4.2@8.865,11.874 ; 8.865,12.637 cw(c10.161,12.637) R6.1@9.244,13.554 ; v3(15.287,33.812) C13.2@16.293,33.812 ; v3@23.09,7.315 ccw(c23.062,7.722) C39.2@23.47,7.722 ; v3@23.106,7.323 ccw(c22.248,8.192) C39.2@23.47,8.192 C39.2@23.47,7.722 ; C39.2@23.352,8.171 cw(c22.419,8.011) v3(23.089,7.341) C39.2@23.47,7.722 ; v2(33.02,5.334) 34.379,6.693 C56.2@34.379,7.62
  Bottom Layer w0.254: v3(16.957,15.003) v3@16.993,14.967 ; v3@17.247,9.55 v3(17.352,9.656)
  Bottom Layer w0.762: v1(15.24,35.814) 15.24,33.858 v3(15.287,33.812) ; CONN4.0@21.724,7.551 21.934,7.341 v3(23.089,7.341) ; CONN4.0@22.213,7.744 ccw(c23.089,8.492) v3(23.089,7.341) ; CONN4.0@22.228,6.925 cw(c23.089,6.242) v3(23.089,7.341)
  other v2: 73.753,6.622 45.253,9.622 51.253,9.622 37.753,12.622 43.753,12.622 76.753,12.622 75.253,15.622 34.753,18.622 73.753,18.622 76.753,18.622 75.253,21.622 78.253,21.622 34.753,24.622 73.753,24.622 76.753,24.622 4.753,36.622 19.753,36.622 22.753,36.622 28.753,36.622 43.753,36.622 42.253,39.622 75.253,39.622 10.753,42.622 25.753,42.622 34.753,42.622 40.753,42.622 43.753,42.622 46.753,42.622 73.753,42.622 18.253,45.622 42.253,45.622 45.253,45.622 48.253,45.622 75.253,45.622 78.253,45.622 37.753,48.622 40.753,48.622 43.753,48.622 46.753,48.622 49.753,48.622 52.753,48.622 55.753,48.622 58.753,48.622 61.753,48.622 64.753,48.622 70.753,48.622 73.753,48.622 76.753,48.622 39.253,51.622 42.253,51.622 45.253,51.622 48.253,51.622 51.253,51.622 54.253,51.622 57.253,51.622 60.253,51.622 63.253,51.622 75.253,51.622 78.253,51.622 40.753,54.622 43.753,54.622 46.753,54.622 49.753,54.622 52.753,54.622 55.753,54.622 58.753,54.622 61.753,54.622 64.753,54.622 67.753,54.622 73.753,54.622 33.253,57.622 42.253,57.622 45.253,57.622 48.253,57.622 51.253,57.622 54.253,57.622 57.253,57.622 60.253,57.622 63.253,57.622 69.253,57.622
  other v4: 73.476,35.503 74.676,35.503 75.876,35.503 73.476,36.703 74.676,36.703 75.876,36.703 73.476,37.903 74.676,37.903 75.876,37.903
  other v5: 54.483,31.115 58.42,31.115 29.845,42.418 23.241,45.466 25.273,46.482
  other v6: 27.669,46.261 28.669,46.261 28.169,46.761 28.575,47.117 27.669,47.261
  other v7: 37.981,10.045 38.981,10.045 37.981,11.545 38.981,11.545
  other v8: 53.213,9.144 79.375,18.288 79.375,20.955 79.375,23.622
  other v9: 61.341,1.778 58.166,4.064
  other v10: 62.865,1.778
  other v11: 28.448,43.942
GYRO_CS#: R22.1 U1.14 U4.8 | length 36.4
  Top Layer w0.203: v3@14.527,32.92 ccw(c14.349,33.098) 14.601,33.098 ; 14.601,33.119 ccw(c15.085,33.119) v3@14.743,32.777 ; 14.601,33.609 ccw(c15.575,33.609) v3@14.886,32.92 ; v3(14.707,32.741) 14.601,32.846 14.601,34.286 15.724,35.409 19.023,35.409 20.588,33.845 R22.1@20.588,33.63 ; 19.876,34.556 cw(c19,33.68) R22.1@20.239,33.68 ; 20.223,34.209 cw(c19.694,33.68) R22.1@20.442,33.68 ; 20.275,34.158 ccw(c20.588,34.471) R22.1@20.588,34.028
  Top Layer w0.254: v3@12.929,22.327 12.675,22.073 ; v3@12.957,22.121 ccw(c12.849,21.898) 12.675,22.073 ; U1.14@14.594,19.37 13.426,19.37 12.675,20.121 12.675,22.073 ; U4.8@18.771,31.989 U4.8@18.759,31.977 18.759,32.856 19.533,33.63 R22.1@20.588,33.63 ; R22.1@20.359,33.401 ccw(c19.808,32.85) 19.808,33.63 ccw(c19.808,34.409) R22.1@20.359,33.858
  Bottom Layer w0.203: v3@12.876,22.506 ccw(c12.442,22.94) 13.056,22.94 ccw(c13.669,22.94) v3@13.235,22.506 ; v3(13.056,22.327) 13.056,26.01 15.024,27.978 15.024,32.423 v3(14.707,32.741) ; v3@14.527,32.561 cw(c13.327,31.361) 15.024,31.361 ; v3@14.671,32.705 cw(c13.817,31.851) 15.024,31.851 ; v3@14.814,32.848 cw(c14.308,32.342) 15.024,32.342
GYRO_INT#: U1.13 U4.12 | length 18.1
  Top Layer w0.203: v3(15.977,32.106) 16.106,31.977 U4.12@16.759,31.977 cw(c16.759,32.712) v3@16.177,32.261 ; v3@16.017,32.137 ccw(c16.344,32.39) 16.344,31.977
  Top Layer w0.254: v3@13.275,21.149 cw(c12.885,20.759) 13.437,20.759 cw(c13.988,20.759) v3@13.598,21.149 ; v3(13.437,21.311) 13.437,20.168 13.735,19.87 U1.13@14.594,19.87 ; 13.678,19.926 ccw(c13.801,20.049) U1.13@13.801,19.875
  Bottom Layer w0.203: v3(13.437,21.311) 13.716,21.59 13.716,26.059 15.43,27.774 15.43,31.559 v3(15.977,32.106) ; v3@15.723,32.106 cw(c15.109,32.106) 15.543,31.672 cw(c15.977,31.238) v3@15.977,31.852
GYRO_VDD: C10.1 C12.1 L1.1 U4.13 | length 5.4
  Top Layer w0.305: C12.1@14.326,31.083 14.495,31.252 U4.13@16.034,31.252 ; C12.1@14.551,30.908 cw(c15.381,30.077) 15.381,31.252
  Top Layer w0.635: C10.1@13.056,31.083 C12.1@14.326,31.083
  Top Layer w0.762: C10.1@13.056,31.083 L1.1@13.056,32.504
INV: C11.1 R6.2 U1.20 U6.1 | length 50
  Top Layer w0.203: v3(5.563,6.198) 5.563,7.945 6.23,8.612 6.23,9.475 5.841,9.863 5.841,10.615 6.025,10.799 6.025,12.908 6.274,13.157 6.739,13.621 6.739,14.264 C11.1@7.595,15.12 ; 6.82,14.345 ccw(c5.913,15.253) C11.1@7.196,15.253 ; 7.142,14.667 cw(c7.595,14.213) C11.1@7.595,14.854 ; 7.167,14.692 ccw(c6.607,15.253) C11.1@7.399,15.253 ; U6.1@25.181,8.119 cw(c25.055,7.993) 25.233,7.993 cw(c25.41,7.993) U6.1@25.284,8.119 ; 25.233,7.806 ccw(c25.84,7.806) v3@25.411,7.377 ; U6.1@25.233,8.297 ccw(c26.331,8.297) v3@25.554,7.52 ; U6.1@25.233,8.321 25.233,7.229 25.248,7.214 v3(25.375,7.341)
  Top Layer w0.254: C11.1@7.595,15.12 C11.1@7.595,15.253 9.196,15.253 R6.2@9.246,15.303 10.223,15.303 11.29,16.37 U1.20@14.594,16.37 ; C11.1@7.858,14.989 cw(c8.495,14.352) 8.495,15.253 cw(c8.495,16.153) C11.1@7.858,15.516 ; 8.295,15.253 ccw(c8.295,16.203) R6.2@8.967,15.531 ; 8.537,15.253 cw(c8.537,14.644) R6.2@8.967,15.074 ; R6.2@9.524,15.074 cw(c10.075,14.523) 10.075,15.303 cw(c10.075,16.082) R6.2@9.524,15.531
  Bottom Layer w0.203: v3(5.563,6.198) 6.833,4.928 14.408,4.928 15.322,5.842 23.114,5.842 23.472,6.2 23.472,6.734 23.859,7.121 25.155,7.121 v3(25.375,7.341) ; 24.231,7.121 ccw(c24.231,8.484) v3@25.195,7.52 ; 24.721,7.121 ccw(c24.721,7.994) v3@25.339,7.377
LED_BLUE: R9.2 U1.39 | length 33.4
  Top Layer w0.254: v1(5.69,15.596) 5.69,19.964 8.23,22.504 8.23,25.883 6.54,27.573 R9.2@6.54,27.661 ; R9.2@6.54,27.288 cw(c6.54,26.6) 7.026,27.086 ; R9.2@6.863,27.611 ccw(c7.734,27.611) 7.118,26.994 ; U1.39@22.694,15.37 19.77,15.37 18.543,16.597 17.058,16.597 16.657,16.195 16.311,15.85 v3@16.231,15.85 ; v3@16.231,15.85 16.184,15.85 16.104,15.769 v3(16.104,15.596) v3@16.231,15.85
  Bottom Layer w0.254: v1(5.69,15.596) v3(16.104,15.596)
MISO: U1.16 U4.9 | length 27.1
  Top Layer w0.203: U4.9@18.259,31.977 18.259,33.169 18.898,33.808 v3(18.898,34.011) ; 18.32,33.23 ccw(c17.54,34.011) v3@18.644,34.011 ; 18.667,33.577 ccw(c18.234,34.011) v3@18.847,34.011
  Top Layer w0.254: U1.16@14.594,18.37 16.211,18.37 v3(16.739,18.898)
  Bottom Layer w0.203: v3(16.739,18.898) 16.739,20.015 14.529,22.225 14.529,24.054 16.586,26.111 18.028,26.111 18.618,26.701 18.618,27.172 19.005,27.559 19.552,27.559 19.555,27.556 20.295,28.296 20.295,32.614 v3(18.898,34.011) ; v3@18.898,33.757 cw(c18.898,33.143) 19.331,33.577 cw(c19.765,34.011) v3@19.152,34.011
MOSI: U1.17 U4.24 | length 17.4
  Top Layer w0.203: v3@19.099,27.078 ccw(c18.665,27.512) 19.279,27.512 ccw(c19.892,27.512) v3@19.458,27.078 ; U4.24@19.211,27.792 cw(c19.049,27.63) 19.279,27.63 ; U4.24@19.259,28.027 19.279,28.007 v3(19.279,26.899)
  Top Layer w0.254: U1.17@14.594,17.87 16.854,17.87 17.501,18.517 v3(17.501,19.66)
  Bottom Layer w0.203: v3(17.501,19.66) 17.501,19.914 14.935,22.479 14.935,23.597 17.043,25.705 18.196,25.705 19.279,26.787 v3(19.279,26.899)
NetC8_1: C8.1 U2.4 | length 5
  Top Layer w0.508: U2.4@6.877,8.217 cw(c7.306,7.788) 7.306,8.395 ; U2.4@7.061,7.908 7.547,8.395 C8.1@8.611,8.395 ; U2.4@7.236,7.858 cw(c8.532,6.561) C8.1@8.532,8.395 ; U2.4@7.257,7.908 cw(c7.73,7.908) 7.395,8.242 ; C8.1@8.437,8.221 ccw(c8.017,7.801) 8.017,8.395 ccw(c8.017,8.988) C8.1@8.437,8.569
NetC9_1: C9.1 U3.4 | length 1.7
  Top Layer w0.635: C9.1@11.189,27.661 11.189,29.105 U3.4@11.335,29.251
NetC13_1: C13.1 U4.10 | length 2.7
  Top Layer w0.305: C13.1@17.518,33.658 cw(c16.936,33.077) 17.759,33.077 ; C13.1@17.693,33.685 17.759,33.619 U4.10@17.759,31.977 ; 17.759,33.395 cw(c18.131,33.395) C13.1@17.868,33.658
NetC14_2: C14.2 U4.20 | length 4.6
  Top Layer w0.305: C14.2@14.326,27.088 16.928,27.088 17.259,27.419 U4.20@17.259,28.027 ; C14.2@14.551,26.912 cw(c14.973,26.49) 14.973,27.088 cw(c14.973,27.685) C14.2@14.551,27.263
NetC48_2: C48.2 U201.16 | length 2.4
  Bottom Layer w0.3: C48.2@71.755,40.094 71.755,38.455 72.474,38.455 U201.16@72.476,38.453
NetC53_2: C53.2 U45.9 | length 3.3
  Top Layer w0.3: U45.9@29.644,46.011 29.644,44.359 C53.2@30.823,43.18
NetC501_1: C501.1 MG1.12 | length 1.4
  Top Layer w0.152: MG1.12@27.18,33.657 27.18,34.938 C501.1@27.294,35.052
NetC501_2: C501.2 MG1.8 | length 4.4
  Top Layer w0.3: C501.2@29.094,35.052 30.226,35.052 30.607,34.671 30.607,33.401 30.186,32.98 MG1.8@29.358,32.98
NetC502_2: C502.2 MG1.10 | length 7
  Top Layer w0.3: C502.2@24.727,35.052 24.727,35.541 25.889,36.703 27.432,36.703 28.194,35.941 28.18,35.927 MG1.10@28.18,33.657
NetC2010_2: C2010.2 J7.17 R47.2 U1001.17 | length 110.7
  Top Layer w0.152: R47.2@27.305,57.873 29.298,57.873 v1(29.337,57.912) ; v1(36.957,37.084) 37.973,37.084 42.545,32.512 v1(42.545,24.384) ; U1001.17@54.97,32.44 54.97,31.528 55.23,31.268 55.23,29.988 56.412,28.806 56.412,7.565 57.404,6.573 v1(57.404,5.842) ; v1@57.404,5.715 v1(57.404,5.842) ; J7.17@62.382,2.997 62.382,2.136 62.271,2.024 62.271,1.692 61.595,1.016 59.207,1.016 56.77,3.454 56.77,5.208 v1(57.404,5.842)
  Bottom Layer w0.152: v1(29.337,57.912) 36.957,50.292 v1(36.957,37.084) ; 41.401,23.241 41.401,15.896 45.974,11.323 ; 41.402,23.241 v1(42.545,24.384) ; C2010.2@44.869,10.922 45.573,10.922 45.974,11.323 ; v1(57.404,5.842) 57.404,6.108 55.892,7.62 49.677,7.62 45.974,11.323
NetCONN2_4: CONN2.4 R10.2 U6.2 | length 8.8
  Top Layer w0.254: CONN2.4@25.78,5.724 ccw(c25.533,5.971) 25.883,5.971 ; U6.2@25.849,8.137 cw(c25.644,7.932) 25.933,7.932 ; 25.883,6.068 ccw(c26.369,6.068) CONN2.4@26.025,5.724 ; U6.2@25.883,8.321 25.933,8.27 25.933,7.752 26.06,7.625 26.06,7.057 25.883,6.879 25.883,5.147 CONN2.4@25.903,5.127 28.439,5.127 R10.2@28.55,5.016 ; CONN2.4@26.025,5.004 cw(c26.32,4.709) 26.32,5.127 cw(c26.32,5.544) CONN2.4@26.025,5.249 ; 27.513,5.127 cw(c27.513,4.234) R10.2@28.144,4.865 ; 27.673,5.127 ccw(c27.673,5.794) R10.2@28.144,5.322
NetD2_1: D2.1 R1.2 | length 3.3
  Top Layer w0.508: D2.1@3.188,25.629 R1.2@4.84,25.629 ; D2.1@3.362,25.455 cw(c3.782,25.035) 3.782,25.629 cw(c3.782,26.223) D2.1@3.362,25.803 ; R1.2@4.701,25.49 ccw(c4.366,25.155) 4.366,25.629 ccw(c4.366,26.102) R1.2@4.701,25.767
NetD5_1: D5.1 R9.1 | length 3.3
  Top Layer w0.508: D5.1@3.188,27.661 R9.1@4.84,27.661 ; D5.1@3.362,27.487 cw(c3.782,27.067) 3.782,27.661 cw(c3.782,28.255) D5.1@3.362,27.835 ; R9.1@4.701,27.522 ccw(c4.366,27.187) 4.366,27.661 ccw(c4.366,28.134) R9.1@4.701,27.799
NetDebug_2: Debug.2 U201.15 | length 17.1
  Top Layer w0.3: v1(70.612,42.926) v1(70.612,47.371)
  Bottom Layer w0.3: Debug.2@68.034,51.296 68.034,48.129 68.688,47.474 70.509,47.474 v1(70.612,47.371) ; v1(70.612,42.926) 70.612,38.575 71.215,37.972 71.787,37.972 71.815,38 72.529,38 U201.15@72.576,37.953
NetDebug_3: Debug.3 U201.14 | length 16.7
  Top Layer w0.3: v1(68.961,44.323) v1(68.961,48.133)
  Bottom Layer w0.3: Debug.3@68.834,51.296 68.834,48.26 v1(68.961,48.133) ; v1(68.961,44.323) 68.961,38.862 70.323,37.5 72.529,37.5 U201.14@72.576,37.453
NetDS3_1: DS3.1 Q9.3 | length 2.4
  Top Layer w0.5: DS3.1@38.219,4.583 Q9.3@40.635,4.583
NetDS3_2: DS3.2 R88.1 | length 1.6
  Top Layer w0.5: R88.1@37.019,6.096 37.019,4.783 DS3.2@37.219,4.583 DS3.2@37.208,4.572
NetH23_1: H23.1 R2001.2 | length 3.1
  Bottom Layer w0.3: R2001.2@14.097,45.427 H23.1@14.097,48.502
NetJ7_3: J7.3 Power.4 U1001.3 | length 53.3
  Top Layer w0.152: U1001.3@57.764,32.44 57.764,27.361 57.15,26.747 57.15,22.352 ; v1(58.166,22.352) 57.15,22.352 ; J7.3@59.588,2.997 59.588,2.311 59.493,2.311 59.379,2.197 58.985,2.197 58.871,2.311 58.776,2.311 57.38,3.707 57.38,4.535 58.294,5.449 58.294,6.547 57.15,7.691 57.15,22.352
  Bottom Layer w0.152: v1(58.166,22.352) 60.325,22.352 71.285,11.392 Power.4@72.505,11.392
NetJ7_7: J7.7 U1001.7 | length 35.8
  Top Layer w0.152: U1001.7@56.976,32.44 56.976,31.514 56.565,31.103 56.565,30.619 56.718,30.466 56.718,22.226 56.769,22.174 56.769,7.64 57.989,6.42 57.989,5.575 57.075,4.661 57.075,3.58 59.258,1.397 60.325,1.397 60.376,1.448 J7.7@60.376,2.997
NetJ7_16: J7.16 Power.3 U1001.16 | length 56.2
  Top Layer w0.2: U1001.16@55.376,35.081 55.376,35.896 58.088,38.608 60.325,38.608 61.976,36.957 v1(61.976,22.352) 61.976,14.215 62.23,13.961 62.23,7.668 62.044,7.482 62.044,7.456 61.976,7.388 J7.16@61.976,5.639
  Bottom Layer w0.2: v1(61.976,22.352) 61.976,21.167 70.951,12.192 Power.3@72.505,12.192
NetJ7_18: J7.18 Power.2 U1001.18 | length 56
  Top Layer w0.2: U1001.18@54.97,35.081 54.97,36.047 57.884,38.961 60.48,38.961 62.611,36.83 v1(62.611,21.717) 62.611,20.828 62.484,20.701 62.484,14.224 62.611,14.097 62.611,7.736 ; J7.18@62.382,5.639 62.397,5.653 62.397,7.336 62.583,7.522 62.583,7.708
  Bottom Layer w0.2: v1(62.611,21.717) 62.611,21.209 64.673,19.147 64.673,18.968 70.688,12.954 Power.2@72.517,12.954
NetJ7_22: J7.22 U201.30 U1001.27 | length 59.5
  Top Layer w0.2: U1001.27@52.963,32.44 52.963,29.714 v1(53.848,28.829) ; J7.22@63.17,5.639 63.222,5.691 63.222,7.162 63.317,7.258 63.317,10.993 63.754,11.43 63.754,17.944 64.516,18.706 v1(64.516,28.321) ; v1(73.66,28.321) 73.66,32.893 75.687,34.92 77.366,34.92 78.232,35.786 v1(78.232,36.068)
  Bottom Layer w0.2: v1(53.848,28.829) 54.457,28.22 64.415,28.22 v1(64.516,28.321) v1(73.66,28.321) ; U201.30@76.776,35.953 78.117,35.953 v1(78.232,36.068)